# Altium PCB BLE_utri092.PcbDoc
Units mm, origin at the board's own origin, x right, y up, seen from the top; angles counter-clockwise.
Board outline 152.4 x 101.6 mm, 2 copper layers (Top Layer, Bottom Layer); 25 components, 14 nets, 85 pads, 0 vias.
Unrouted connection lines stored in the file: 50.
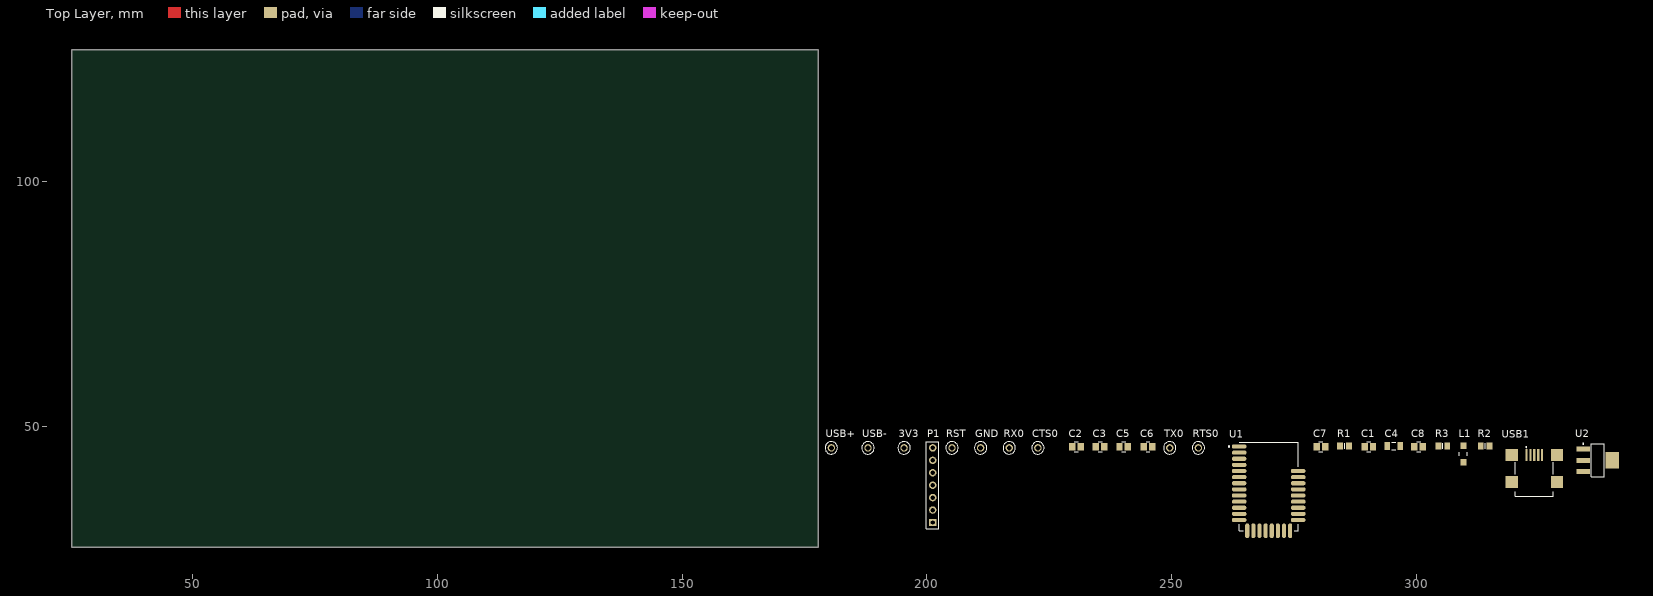
[diagram p0: Top Layer view]
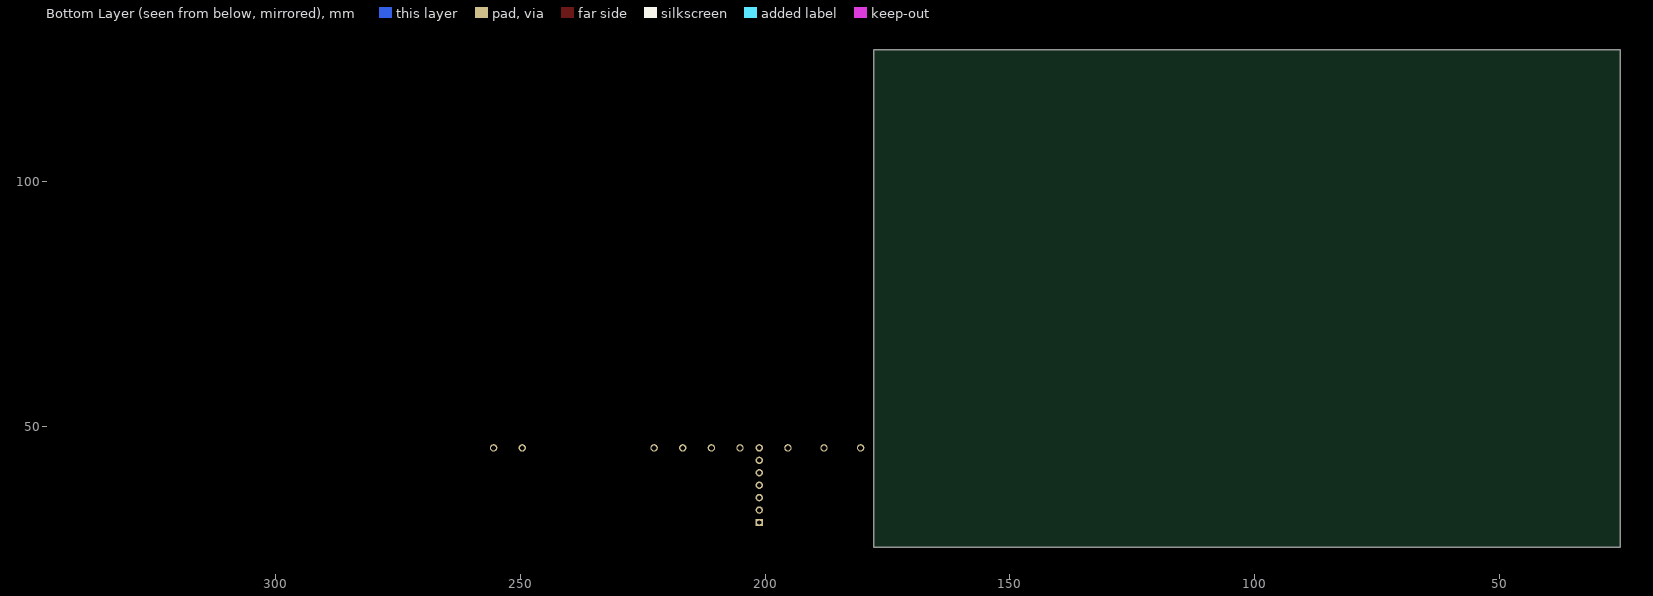
[diagram p1: Bottom Layer view, seen from below]

## Layer stack, top to bottom
Top Solder: solder mask 0.0102, Solder Resist, Dk 3.5
Top Layer: signal copper 0.0356
Dielectric 1: dielectric 0.32, FR-4, Dk 4.8
Bottom Layer: signal copper 0.0356
Bottom Solder: solder mask 0.0102, Solder Resist, Dk 3.5

## Board outline
25.4,25.4 177.8,25.4 177.8,127 25.4,127

## Design rules (kind name [scope] priority, off if disabled: settings)
Clearance [All] p1: gap=0.4 ignorepadtopadclearanceinfootprint=TRUE
PolygonConnect [All] p1: connectstyle=Relief reliefconductorwidth=0.254 reliefentries=4 polygonreliefangle="90 Angle" airgapwidth=0.254
RoutingVias [All] p1: holewidth=0.711 width=1.27 viastyle="Through Hole" minholewidth=0.711 minwidth=1.27 maxholewidth=0.711 maxwidth=1.27
SolderMaskExpansion [All] p1: expansion=0.102 istentingtop=FALSE
Width [All] p1: maxlimit=1.2 minlimit=0.4 preferedwidth=0.5
30 further rules are at their usual default settings.

## Components (designator, comment, footprint, x,y, rotation, side; value= is the part's Value field where it differs from the comment)
3V3 "5003" TP_TH 195.326,45.72 r0 top
C1 "1u" C0805 290.195,45.974 r0 top value=?
C2 "1u" C0805 230.505,45.974 r0 top value=?
C3 "1u" C0805 235.331,45.974 r0 top value=?
C4 "4u7" C1206 295.275,46.101 r0 top value=100nF/100V
C5 "1u" C0805 240.157,45.974 r0 top value=?
C6 "1u" C0805 245.11,45.974 r0 top value=?
C7 "4p7" C0805 280.416,45.974 r0 top value=?
C8 "4p7" C0805 300.355,45.974 r0 top value=?
CTS0 "5003" TP_TH 222.631,45.72 r90 top
GND "5003" TP_TH 210.947,45.72 r0 top
L1 "1k Ferrite Bead" FileName=FE_Bead_1206:\PCBLib\0.pcblib 309.499,44.45 r90 top
P1 "BLE Headers" HDR1X7 201.168,30.48 r90 top
R1 "Resistor 0805" R0805 285.242,46.101 r0 top value=?
R2 "Resistor 0805" R0805 313.944,46.101 r0 top value=?
R3 "Resistor 0805" R0805 305.308,46.101 r0 top value=?
RST "5003" TP_TH 205.105,45.72 r0 top
RTS0 "5003" TP_TH 255.397,45.72 r90 top
RX0 "5003" TP_TH 216.789,45.72 r0 top
TX0 "5003" TP_TH 249.555,45.72 r0 top
U1 "BLE112-A-V1" FileName=BLE112:\PCBLib\0.pcblib 269.748,37.846 r0 top
U2 "LDL1117S33R" SOT223L 336.931,43.18 r0 top value=3.3V/1.2A
USB1 "USB Mini B Con" USB_UJ2MAB 323.977,40.894 r0 top
USB+ "5003" TP_TH 180.467,45.72 r90 top
USB- "5003" TP_TH 187.96,45.72 r90 top

## Footprints (in the part's own frame and the unit in brackets; to place one, negate y for a bottom-side part, rotate by r counter-clockwise, add the part's x,y. Pads: shape width x height; smd on the part's side, far side on the other; paste and mask are expansions set on the pad)
C0805 [mm]
  rect 1.3x1.5 smd: 1(-0.85,0) 2(0.85,0)
  silkscreen extent -0.4,-1 0.4,1, body extent -1.03,-0.63 1,0.64, height 0.65
C1206 [mm] "Chip Capacitor, Body 3.2x1.6mm, IPC High Density"
  rect 1.1x1.7 smd: 1(-1.35,0) 2(1.35,0)
  silkscreen extent -0.4,-0.75 0.4,0.75, body extent -1.6,-0.8 1.6,0.8, height 1.5
FileName=BLE112:\PCBLib\0.pcblib [mm] "BLE112-A, 30-Leads, Body 12.05x18.1mm, Pitch 1.25mm"
  oval 3x0.85 smd: 1(-6.025,8.15) 2(-6.025,6.9) 3(-6.025,5.65) 4(-6.025,4.4) 5(-6.025,3.15) 6(-6.025,1.9) 7(-6.025,0.65) 8(-6.025,-0.6) 9(-6.025,-1.85) 10(-6.025,-3.1) 11(-6.025,-4.35) 12(-6.025,-5.6) 13(-6.025,-6.85) 22(6.025,-6.85) 23(6.025,-5.6) 24(6.025,-4.35) 25(6.025,-3.1) 26(6.025,-1.85) 27(6.025,-0.6) 28(6.025,0.65) 29(6.025,1.9) 30(6.025,3.15)
  oval 0.85x3 smd: 14(-4.375,-9.05) 15(-3.125,-9.05) 16(-1.875,-9.05) 17(-0.625,-9.05) 18(0.625,-9.05) 19(1.875,-9.05) 20(3.125,-9.05) 21(4.375,-9.05)
  silkscreen extent -8.2,-9.05 6.02,9.05, body extent -6.02,-9.05 6.02,9.05, height 2.3
FileName=FE_Bead_1206:\PCBLib\0.pcblib [mm] "Chip Inductor, 2-Leads, Body 3.2x1.6mm"
  rect 1.35x1.2 smd: 1(-1.675,0) 2(1.675,0)
  silkscreen extent -0.35,-0.8 0.35,0.8, body extent -1.6,-0.8 1.6,0.8, height 1.09
HDR1X7 [mm] "Connector; Header; 7 Position"
  rect 1.5x1.5 hole 0.9: 1(0,0)
  round 1.5 hole 0.9: 2(2.54,0) 3(5.08,0) 4(7.62,0) 5(10.16,0) 6(12.7,0) 7(15.24,0)
  silkscreen extent -1.27,-1.27 16.51,1.27
R0805 [mm]
  rect 1.2x1.4 smd: 1(-0.9,0) 2(0.9,0)
  silkscreen extent 0,-0.6 0,0.6, body extent -1.04,-0.63 0.99,0.64, height 0.6
SOT223L [mm] "SOT223/SC73, 4-Leads, Body 6.5x3.5mm, Pitch 2.3mm, Lead Span 7mm, IPC Low Density"
  rect 2.7x1 smd: 1(-2.95,2.3) 2(-2.95,0) 3(-2.95,-2.3)
  rect 2.7x3.3 smd: 2(2.95,0)
  silkscreen extent -3.07,-3.35 1.3,3.47, body extent -3.65,-3.35 3.65,3.35, height 1.83
TP_TH [mm] "Test Point, Through Hole, Dia 2.54mm"
  round 1.5 hole 1: 1(0,0)
  silkscreen extent -1.27,-1.27 1.27,1.27, body extent -1.27,-1.27 1.27,1.27, height 4.57
USB_UJ2MAB [mm]
  rect 0.45x2.5 smd: 1(-1.6,3.35) 2(-0.8,3.35) 3(0,3.35) 4(0.8,3.35) 5(1.6,3.35)
  rect 2.5x2.5 smd: 6(-4.61,3.35) 7(4.61,3.35) 8(-4.61,-2.13) 9(4.61,-2.13)
  round 0.45 hole 0.9 unplated: 10(-2.2,0.84) 11(2.2,0.84)
  silkscreen extent -3.86,-5.1 3.86,5.1, body extent -4.83,-5.18 4.83,4.2, height 4.13

## Part data
3V3 CTS0 GND RST RTS0 RX0 TX0 USB+ USB-: library part TestPoint, "Test Point, Orange, 1-Pin THD, RoHS", Forward Current="3 A", Forward Voltage="1.08 V", Max Operating Temperature="150 degC", Max Surge Current="80 A", Min Operating Temperature="-65 degC", Package Quantity=500, Peak Reverse Current="600 uA", ComponentLink1Description="Manufacturer URL", ComponentLink1URL=http://www.keyelco.com/, ComponentLink2Description=Datasheet, ComponentLink2URL=http://keyelco.com/userAssets/file/M65p56.pdf, DatasheetVersion=Jun-15, Diameter="5.3 mm", Height="0.25 inch", Length="9.5 mm", Mount="Through Hole", PackageDescription="1-Pin Through Hole Device, Dia 2.54 mm", PackageReference=5003, Packaging=Bulk, Pins=2, Radiation Hardening=No, REACH SVHC="No SVHC", RoHSCompliant=true, Weight="0.01 lb", Width="0.25 inch"
C1 C2 C3 C5 C6 C7 C8: library part CCAP0805, "CCAP0805", MPN=?, Part Description=?, Type="Surface Mount"
C4: library part "Cap CER Decoup C3216C0G2A104J160AC", "CAP CER 0.1UF 100V C0G 1206", Manufacturer="TDK Corporation", MPN=C3216C0G2A104J160AC, Supplier Part Number 1=1795799, Part Description="CAP CER 0.1UF 100V C0G 1206", Supplier 1=RSComponents, Supplier 2=Element14, Supplier 3=Digi-Key, Supplier 4=Mouser, Supplier Part Number 2=2906828, Supplier Part Number 3=445-172677-1-ND, Supplier Part Number 4=810-C3216C0G2A104J6C, Type="Surface mount"
L1: library part 742792113, "SMD EMI Suppression Ferrite Bead WE-CBF, Z = 120 Ohm", ComponentLink1Description="Manufacturer Link", ComponentLink1URL=http://www.we-online.com, ComponentLink2Description=Datasheet, ComponentLink2URL=http://www.we-online.de/katalog/media/pdf/742792113.pdf, DatasheetVersion=Dec-2005, Impedance="120 Ohm", PackageDescription="Chip Inductor, 2-Leads, Body 3.2 x 1.6 mm", PackageReference=SMD-1206, PackageVersion=2007, PartNumber=742792113
P1: library part "Header 7", "Header, 7-Pin", LatestRevisionDate=17-Jul-2002, LatestRevisionNote="Re-released for DXP Platform.", Publisher="Altium Limited"
R1 R2 R3: library part RES0805, "RES0805", MPN=?, Part Description=?, Type="Surface Mount"
U1: "Bluetooth(R) Low Energy Single Mode Module / , 2 to 3.6 V, -40 to 85 degC, 30-Pin SMD, RoHS, Tape and Reel", Max Operating Temperature="85 degC", Max Supply Voltage="3.6 V", Min Operating Temperature="-40 degC", Min Supply Voltage="2.1 V", ComponentLink1Description="Manufacturer URL", ComponentLink1URL=www.bluegiga.com, ComponentLink2Description=Datasheet, ComponentLink2URL=http://www.mouser.com/ds/2/368/Bluegiga_Technologies_BLE112_Datasheet-558666.pdf, DatasheetVersion="Rev. 1.4, 05/2013", PackageDescription="30-Pin Surface Mount Device, Body 12.05 x 18.1 mm, Pitch 1.25 mm", PackageReference=BLE112-A-V1, Packaging="Cut Tape", PartNumber=BLE112-A-V1, Pins=64, REACH SVHC="No SVHC", RoHSCompliant=true
U2: library part "LDO LDL1117S33R", "IC REG LINEAR 3.3V 1.2A SOT223", Manufacturer=STMicroelectronics, Supplier Part Number 1=2729708, MPN=LDL1117S33R, Part Description="IC REG LINEAR 3.3V 1.2A SOT223", Supplier 1=Element14, Supplier 2=Digi-Key, Supplier 3=Mouser, Supplier Part Number 2=497-17239-1-ND, Supplier Part Number 3=511-LDL1117S33R, Type="Surface mount"
USB1: library part USBMiniB, Supplier Part Number 1=102-4004-1-ND, Supplier 1=Digi-Key

## Nets (pads, with @x,y where several pads share a name; then routed paths per layer and width w, separated by ;. In a path a pad name is that pad's centre, name@x,y a point inside that pad or via, vN(x,y) a via of type N, cw(c..) or ccw(c..) an arc to the next point about the centre after c; other vN are vias at no path point)
3V3: 3V3.1 C2.2 C3.2 C5.2 C6.2 L1.2 U1.2 U1.3 U1.9 U1.20
3V3_IN: C4.2 L1.1 P1.1 U2.2
5V: C1.2 U2.3 USB1.1
CTS_0: CTS0.1 P1.4 U1.24
D+: R1.2 R2.1 USB1.3
D-: R3.2 USB1.2
GND: C1.1 C2.1 C3.1 C4.1 C5.1 C6.1 C7.1 C8.1 GND.1 P1.2 U1.1 U1.10 U1.21 U1.30 U2.1 USB1.5
P1_0: R2.2 U1.18
RESET: P1.7 RST.1 U1.29
RTS_0: P1.3 RTS0.1 U1.23
RX_0: P1.6 RX0.1 U1.26
TX_0: P1.5 TX0.1 U1.25
USB+: C7.2 R1.1 U1.11 USB+.1
USB-: C8.2 R3.1 U1.12 USB-.1
pads on no net: U1.4 U1.5 U1.6 U1.7 U1.8 U1.13 U1.14 U1.15 U1.16 U1.17 U1.19 U1.22 U1.27 U1.28 USB1.4 USB1.6 USB1.7 USB1.8 USB1.9 USB1.10 USB1.11